# Altium PCB 02_UNROUTED_REFINED_PLACEMENT.PcbDoc (part 5 of 5)
Units mil, origin at the board's own origin, x right, y up, seen from the top; angles counter-clockwise.
Board outline 3149.61 x 1771.65 mil, 4 copper layers (L1 TOP, L2 GND, L3 POWER SIGNAL, L4 BOTTOM GND), stack 45.835 mil thick; 209 components, 132 nets, 761 pads, 5 vias.
Unrouted connection lines stored in the file: 548.
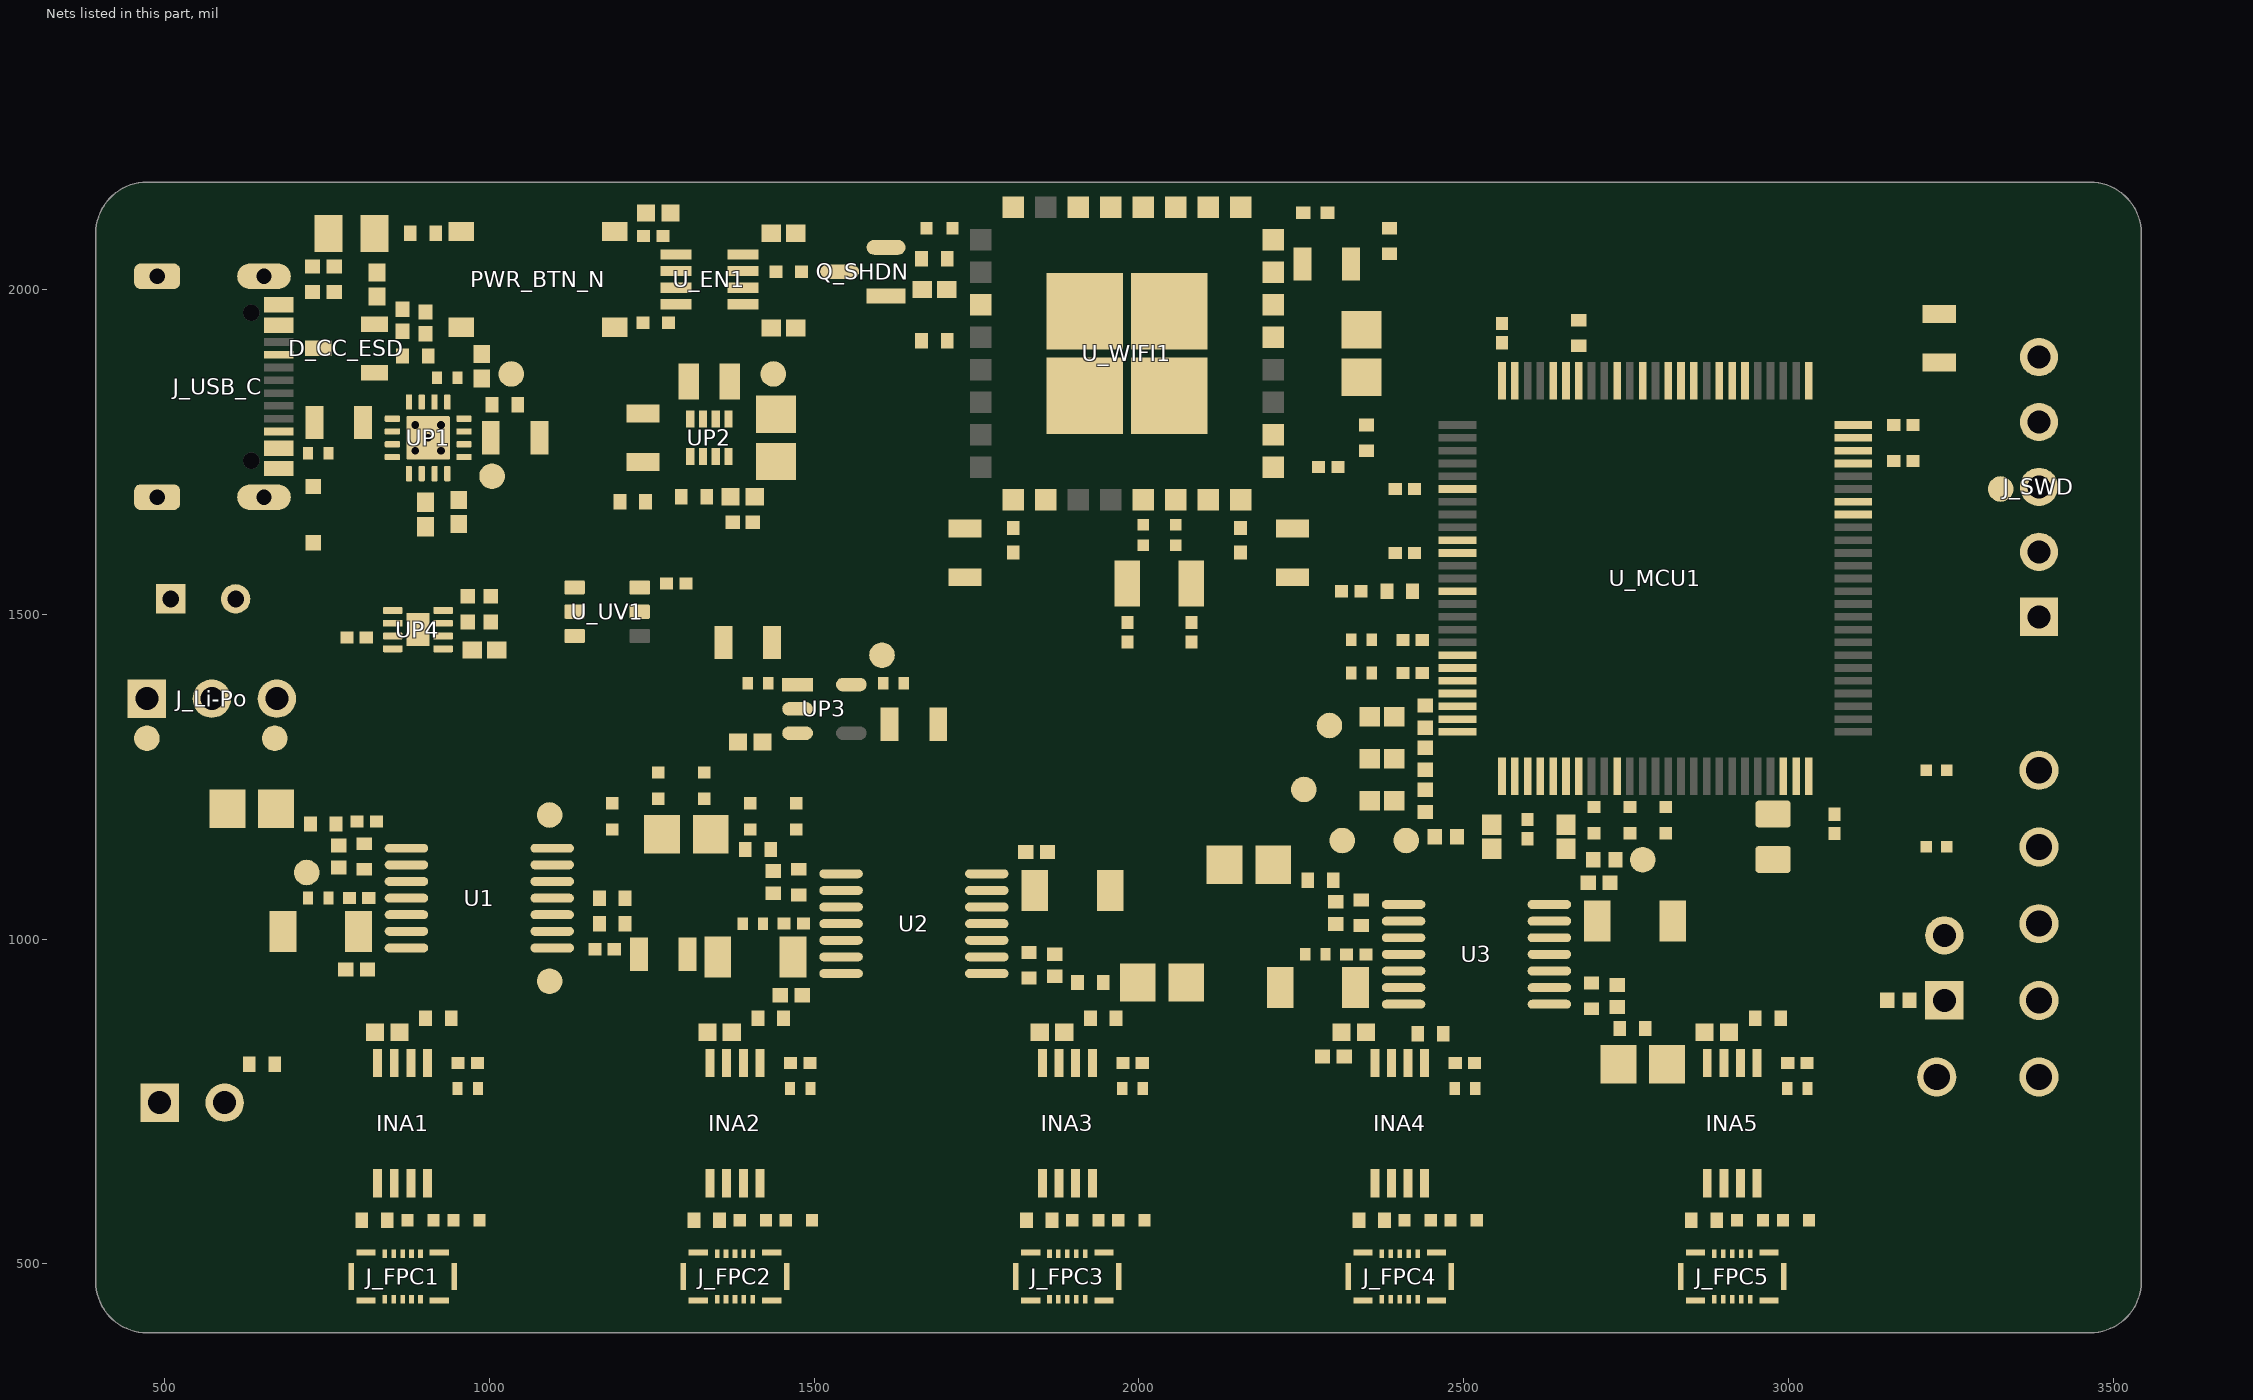
[diagram p2: the nets of this part, all layers, seen from the top]

## Part data (continued)
UP3: library part EMG_R5_UP3, "IC REG LINEAR 3V 300MA SOT23-5", Controlled Revision="R5 2026-09-16; project-local frozen symbol/footprint", RoHS Compliant=Yes
UP4: library part EMG_R5_UP4, "3ÂµA 1-Cell/2-Cell Fuel Gauge with ModelGauge", Package="TDFN-8 Maxim", Availability="In Stock", Check_prices=https://www.snapeda.com/parts/MAX17048G+T10/Analog+Devices/view-part/?ref=eda, Controlled Revision="R5 2026-09-16; project-local frozen symbol/footprint", MF="Analog Devices", MP=MAX17048G+T10, Price=None, Purchase-URL=https://pricing.snapeda.com/search/part/MAX17048G+T10/?ref=eda, SnapEDA_Link=https://www.snapeda.com/parts/MAX17048G+T10/Analog+Devices/view-part/?ref=snap
X_WIFI_32K: library part EMG_R5_X_WIFI_32K, "Epson FC-135 32.768 kHz 9 pF +/-20 ppm, ESR 70 kohm max, 3.2x1.5 mm, 2 terminals", Frequency="32.768 kHz", Load Capacitance="9 pF", Manufacturer="Seiko Epson Corporation", Package="SMD3215 / 3.2 x 1.5 mm / 2 terminal", Temperature Range="-40 to +85 degC", Tolerance="+/-20 ppm at 25 degC, 0.1 uW", Controlled Revision="R5 2026-09-16; project-local frozen symbol/footprint", Datasheet Link=https://download.epsondevice.com/td/pdf/td_xtal_32khz/FC-135_Q13FC13500003_en.pdf, Drive Level="0.1 uW nominal; 0.5 uW maximum", ESR="70 kohm maximum", Height="0.8 +/-0.1 mm", Manufacturer Part Number=Q13FC13500003, Packaging Note="Q13FC13500003xx; xx=00 is 3000/reel"

## Free pads (board coordinates)
  round 39.37 smd paste-19.68 mask+1.97: TP_3V0_ANA(1604.33,1437.01) TP_3V3_DIG(1437.01,1870.08) TP_GND_ANA(718.5,1102.36) TP_GND_DIG(3326.77,1692.91) TP_GND_PWR(472.44,1309.06) TP_VBAT_CELL(669.29,1309.06) TP_VBUS(1033.46,1870.08) TP_VOUT_1(2293.31,1328.74) TP_VOUT_2(2411.42,1151.57) TP_VOUT_3(2312.99,1151.57) TP_VOUT_4(2253.94,1230.32) TP_VOUT_5(2775.59,1122.05) TP_VREF_A(1092.52,935.04) TP_VREF_B_SRC(1092.52,1190.94) TP_VSYS(1003.94,1712.6)

## Via types
v1: diameter 19.68, hole 11.81, L1 TOP to L4 BOTTOM GND, 5 vias

## Nets (pads, with @x,y where several pads share a name; then routed paths per layer and width w, separated by ;. In a path a pad name is that pad's centre, name@x,y a point inside that pad or via, vN(x,y) a via of type N, cw(c..) or ccw(c..) an arc to the next point about the centre after c; other vN are vias at no path point)
3V0_ANA: C1_MCU.1 C2_MCU.2 C3_MCU.1 C4_MCU.2 CCU1.1 CCU2.2 CCU3.2 CCU4.1 CCU5.2 CCU6.1 CCU7.2 CCU8.1 CCU9.2 CCU10.1 Cdiv.2 CU_11.2 CU_12.2 CU_14.2 CU_21.1 CU_22.1 CU_24.1 CUP5_2.2 CUP5_3.2 INA1.5 INA2.5 INA3.5 INA4.5 INA5.5 J_FPC1.P1_1 J_FPC1.P1_2 J_FPC1.P1_3 J_FPC2.P1_1 J_FPC2.P1_2 J_FPC2.P1_3 J_FPC3.P1_1 J_FPC3.P1_2 J_FPC3.P1_3 J_FPC4.P1_1 J_FPC4.P1_2 J_FPC4.P1_3 J_FPC5.P1_1 J_FPC5.P1_2 J_FPC5.P1_3 pad.TP_3V0_ANA RV2.1 U1.4 U2.4 U3.4 U_MCU1.21 U_MCU1.22 UP3.5
3V3_DIG: C_MCU_BULK.1 C_MCU_VDD1.2 C_MCU_VDD2.2 C_MCU_VDD3.2 C_MCU_VDD4.1 C_MCU_VDD5.1 C_VBAT.2 C_VDDUSB.1 C_WIFI_BULK.2 C_WIFI_VDD33.1 C_WIFI_VDD33_HF.1 C_WIFI_VDDIO1.2 C_WIFI_VDDIO1_HF.1 C_WIFI_VDDIO2.2 C_WIFI_VDDIO2_HF.2 CUP4.1 CUP4_FB.2 CUP5_1.1 CUP5_5.1 J_SWD.1 pad.TP_3V3_DIG R_AL.2 R_INT_PULLUP.1 R_KILL_PU.2 R_NRST.2 R_PGOOD.2 R_SCL.2 R_SDA.2 R_WIFI_BOOT_OVR.1 RUP_3.2 U_MCU1.6 U_MCU1.11 U_MCU1.28 U_MCU1.50 U_MCU1.73 U_MCU1.75 U_MCU1.100 U_WIFI1.9 U_WIFI1.16 U_WIFI1.25 UP2.1 UP2.6 UP3.1
ADC_EMG1: C_ADC1.1 R_ADC1.2 U_MCU1.23
ADC_EMG2: C_ADC2.1 R_ADC2.2 U_MCU1.24
ADC_EMG3: C_ADC3.1 R_ADC3.2 U_MCU1.25
ADC_EMG4: C_ADC4.1 R_ADC4.2 U_MCU1.26
ADC_EMG5: C_ADC5.1 R_ADC5.2 U_MCU1.29
AFE_EN: R_EN_PD.1 U_MCU1.85 UP3.3
BAT_TEMP: J_Li-Po.2 R_TH_BAT.2 R_TS_BOTTOM.2 R_TS_SER.1 R_TS_TOP.1
FG_ALRT: R_AL.1 U_MCU1.81 UP4.5
GND: C1_EN1.1 C1_MCU.2 C2_EN1.2 C2_MCU.1 C3_EN1.1 C3_MCU.2 C4_MCU.1 C_ADC1.2 C_ADC2.2 C_ADC3.2 C_ADC4.2 C_ADC5.2 C_BAT.2 C_IN_.2 C_MCU_BULK.2 C_MCU_VDD1.1 C_MCU_VDD2.1 C_MCU_VDD3.1 C_MCU_VDD4.2 C_MCU_VDD5.2 C_NRST.2 C_OUT_.2 C_UV_BYPASS.2 C_VBAT.1 C_VBUS.1 C_VDDUSB.2 C_WIFI_BULK.1 C_WIFI_EN.2 C_WIFI_VDD33.2 C_WIFI_VDD33_HF.2 C_WIFI_VDDIO1.1 C_WIFI_VDDIO1_HF.2 C_WIFI_VDDIO2.1 C_WIFI_VDDIO2_HF.1 C_WIFI_X32_IN.1 C_WIFI_X32_OUT.1 CCU1.2 CCU2.1 CCU3.1 CCU4.2 CCU5.1 CCU6.2 CCU7.1 CCU8.2 CCU9.1 CCU10.2 Cdiv.1 Cdiv_1.1 Cdiv_10uF.1 CU6_1.1 CU_11.1 CU_12.1 CU_14.1 CU_21.2 CU_22.2 CU_24.2 CUP4.2 CUP4_1.2 CUP5_1.2 CUP5_2.1 CUP5_3.1 CUP5_5.2 D_CC_ESD.3 D_VBUS.2 INA1.1 INA1.4 INA2.1 INA2.4 INA3.1 INA3.4 INA4.1 INA4.4 INA5.1 INA5.4 J_FPC1.1 J_FPC1.3 J_FPC1.5 J_FPC1.7 J_FPC1.9 J_FPC1.10 J_FPC1.P2_1 J_FPC1.P2_2 J_FPC1.P2_3 J_FPC2.1 J_FPC2.3 J_FPC2.5 J_FPC2.7 J_FPC2.9 J_FPC2.10 J_FPC2.P2_1 J_FPC2.P2_2 J_FPC2.P2_3 J_FPC3.1 J_FPC3.3 J_FPC3.5 J_FPC3.7 J_FPC3.9 J_FPC3.10 J_FPC3.P2_1 J_FPC3.P2_2 J_FPC3.P2_3 J_FPC4.1 J_FPC4.3 J_FPC4.5 J_FPC4.7 J_FPC4.9 J_FPC4.10 J_FPC4.P2_1 J_FPC4.P2_2 J_FPC4.P2_3 J_FPC5.1 J_FPC5.3 J_FPC5.5 J_FPC5.7 J_FPC5.9 J_FPC5.10 J_FPC5.P2_1 J_FPC5.P2_2 J_FPC5.P2_3 J_Li-Po.1 J_SWD.3 J_USB_C.A1_B12 J_USB_C.B1_A12 J_USB_C.SH1 J_USB_C.SH2 J_USB_C.SH3 J_USB_C.SH4 MCU_VCAP.1 pad.TP_GND_ANA pad.TP_GND_DIG pad.TP_GND_PWR PWR_BTN_N.C PWR_BTN_N.D Q_SHDN.2 R_EN_PD.2 R_LIM.1 R_MCU_BOOT0_PD.1 R_SHDN_PD.1 R_TH_BAT.1 R_TMR.1 R_TS_BOTTOM.1 R_WIFI_BOOT_PD.1 R_WIFI_CS_PD.2 R_WIFI_EN_PD.2 RISET.2 RJ1.1 RJ2.1 RUP_4.1 RV1.2 TP_GND.TP U1.11 U2.11 U3.11 U_EN1.4 U_MCU1.10 U_MCU1.19 U_MCU1.20 U_MCU1.27 U_MCU1.49 U_MCU1.74 U_MCU1.99 U_UV1.2 U_WIFI1.10 U_WIFI1.15 U_WIFI1.18 U_WIFI1.26 U_WIFI1.30 U_WIFI1.32 U_WIFI1.33 U_WIFI1.34 U_WIFI1.35 U_WIFI1.36 UP1.4 UP1.5 UP1.8 UP1.15 UP1.17@905.51,1771.65 UP2.7 UP3.2 UP4.1 UP4.4 UP4.6 UP4.9
  other v1: 885.83,1751.97 925.2,1751.97 905.51,1771.65 885.83,1791.34 925.2,1791.34
I2C_SCL: R_SCL.1 U_MCU1.95 UP4.7
I2C_SDA: R_SDA.1 U_MCU1.96 UP4.8
INA_OUT_1: CL_1.2 INA1.8 RH_1.1 Rservo_1.2
INA_OUT_2: CL_2.2 INA2.8 RH_2.1 Rservo_2.2
INA_OUT_3: CL_3.2 INA3.8 RH_3.1 Rservo_3.2
INA_OUT_4: CL_4.2 INA4.8 RH_4.1 Rservo_4.2
INA_OUT_5: CL_5.2 INA5.8 RH_5.1 Rservo_5.2
KILL_CTRL: Q_SHDN.3 R_KILL_PU.1 U_EN1.8
MCU_BOOT0: R_MCU_BOOT0_PD.2 TP_MCU_BOOT0.TP U_MCU1.94
MCU_NRST: C_NRST.1 J_SWD.5 R_NRST.1 U_MCU1.14
MCU_PWR_INT_N: R_INT_PULLUP.2 U_EN1.5 U_MCU1.83
MCU_SHUTDOWN: R_SHDN_G.2 U_MCU1.86
MCU_SPI_MISO: R_SPI_MISO.2 U_MCU1.31
MCU_SPI_MOSI: R_SPI_MOSI.2 U_MCU1.32
MCU_SPI_SCK: R_SPI_SCK.2 U_MCU1.30
MCU_SWCLK: J_SWD.4 U_MCU1.76
MCU_SWDIO: J_SWD.2 U_MCU1.72
MCU_VCAP: MCU_VCAP.2 U_MCU1.48
MCU_WIFI_CS: R_SPI_CS.2 U_MCU1.35
MCU_WIFI_UART_RX: R_WIFI_UART_RX_LINK.2 U_MCU1.69
MCU_WIFI_UART_TX: R_WIFI_UART_TX_LINK.2 U_MCU1.68
NetC1_EN1_2: C1_EN1.2 R_EN1_1.2 U_EN1.1
NetC2_EN1_1: C2_EN1.1 U_EN1.3
NetC3_EN1_2: C3_EN1.2 U_EN1.7
NetC_WIFI_X32_IN_2: C_WIFI_X32_IN.2 R_WIFI_X32_IN.1 X_WIFI_32K.1
NetC_WIFI_X32_OUT_2: C_WIFI_X32_OUT.2 R_WIFI_X32_OUT.1 X_WIFI_32K.2
NetCH_1_2: CH_1.2 RG_1.1 RGN_1.2 U1.2
NetCH_2_2: CH_2.2 RG_2.1 RGN_2.2 U2.2
NetCH_3_2: CH_3.2 RG_3.1 RGN_3.2 U2.9
NetCH_4_2: CH_4.2 RG_4.1 RGN_4.2 U3.2
NetCH_5_2: CH_5.2 RG_5.1 RGN_5.2 U3.9
NetCL_1_1: CL_1.1 RGN_1.1
NetCL_2_1: CL_2.1 RGN_2.1
NetCL_3_1: CL_3.1 RGN_3.1
NetCL_4_1: CL_4.1 RGN_4.1
NetCL_5_1: CL_5.1 RGN_5.1
NetCservo_1_1: Cservo_1.1 Rservo_1.1 U1.6
NetCservo_2_1: Cservo_2.1 Rservo_2.1 U2.6
NetCservo_3_1: Cservo_3.1 Rservo_3.1 U2.13
NetCservo_4_1: Cservo_4.1 Rservo_4.1 U3.6
NetCservo_5_1: Cservo_5.1 Rservo_5.1 U3.13
NetCUP4_FB_1: CUP4_FB.1 RUP_3.1 RUP_4.2 UP2.8
NetD_CC_ESD_1: D_CC_ESD.1 J_USB_C.A5 RJ1.2
NetD_CC_ESD_2: D_CC_ESD.2 J_USB_C.B5 RJ2.2
NetINA1_2: INA1.2 RDD2.2
NetINA1_3: INA1.3 RDD1.2 RDD3.2
NetINA1_7: INA1.7 RH_1.2 RL_1.1
NetINA2_2: INA2.2 RDD5.2
NetINA2_3: INA2.3 RDD4.2 RDD6.2
NetINA2_7: INA2.7 RH_2.2 RL_2.1
NetINA3_2: INA3.2 RDD8.2
NetINA3_3: INA3.3 RDD7.2 RDD9.2
NetINA3_7: INA3.7 RH_3.2 RL_3.1
NetINA4_2: INA4.2 RDD11.2
NetINA4_3: INA4.3 RDD10.2 RDD12.2
NetINA4_7: INA4.7 RH_4.2 RL_4.1
NetINA5_2: INA5.2 RDD14.2
NetINA5_3: INA5.3 RDD13.2 RDD15.2
NetINA5_7: INA5.7 RH_5.2 RL_5.1
NetJ_FPC1_8: J_FPC1.8 R_VREF1.2
NetJ_FPC2_8: J_FPC2.8 R_VREF2.2
NetJ_FPC3_8: J_FPC3.8 R_VREF3.2
NetJ_FPC4_8: J_FPC4.8 R_VREF4.2
NetJ_FPC5_8: J_FPC5.8 R_VREF5.2
NetJ_REF_1: J_REF.1 J_REF.2 R_ref.1
NetJP_WIFI_BOOT_1: JP_WIFI_BOOT.1 R_WIFI_BOOT_OVR.2
NetL1_1: L1.1 UP2.3
NetL1_2: L1.2 UP2.2
NetLED_CHG_A: LED_CHG.A R_CHG_LED.2
NetLED_CHG_C: LED_CHG.C UP1.9
NetPWR_BTN_N_A: PWR_BTN_N.A PWR_BTN_N.B U_EN1.2
NetQ_SHDN_1: Q_SHDN.1 R_SHDN_G.1 R_SHDN_PD.2
NetR_EN1_BIAS_2: R_EN1_BIAS.2 UP1.6
NetR_LIM_2: R_LIM.2 UP1.12
NetR_TMR_2: R_TMR.2 UP1.14
NetRISET_1: RISET.1 UP1.16
SYS_EN: R_EN.2 U_EN1.6 U_UV1.1 UP2.5
TS: R_TS_SER.2 UP1.1
USB_PGOOD_N: R_PGOOD.1 U_MCU1.82 UP1.7
Va_1: J_FPC1.2 RDD1.1
Va_2: J_FPC2.2 RDD4.1
Va_3: J_FPC3.2 RDD7.1
Va_4: J_FPC4.2 RDD10.1
Va_5: J_FPC5.2 RDD13.1
Vb_1: J_FPC1.4 RDD2.1
Vb_2: J_FPC2.4 RDD5.1
Vb_3: J_FPC3.4 RDD8.1
Vb_4: J_FPC4.4 RDD11.1
Vb_5: J_FPC5.4 RDD14.1
VBAT_CELL: C_BAT.1 CU6_1.2 J_Li-Po.3 pad.TP_VBAT_CELL UP1.2 UP1.3 UP4.2 UP4.3
VBUS: C_IN_.1 C_VBUS.2 D_VBUS.1 J_USB_C.A4_B9 J_USB_C.B4_A9 pad.TP_VBUS R_TS_TOP.2 UP1.13
Vc_1: J_FPC1.6 RDD3.1
Vc_2: J_FPC2.6 RDD6.1
Vc_3: J_FPC3.6 RDD9.1
Vc_4: J_FPC4.6 RDD12.1
Vc_5: J_FPC5.6 RDD15.1
VDiv: Cdiv_1.2 Cdiv_10uF.2 RV1.1 RV2.2 U1.10 U1.12
VOUT_1: CH_1.1 pad.TP_VOUT_1 R_ADC1.1 RG_1.2 U1.1
VOUT_2: CH_2.1 pad.TP_VOUT_2 R_ADC2.1 RG_2.2 U2.1
VOUT_3: CH_3.1 pad.TP_VOUT_3 R_ADC3.1 RG_3.2 U2.8
VOUT_4: CH_4.1 pad.TP_VOUT_4 R_ADC4.1 RG_4.2 U3.1
VOUT_5: CH_5.1 pad.TP_VOUT_5 R_ADC5.1 RG_5.2 U3.8
VREF_A: pad.TP_VREF_A RL_1.2 RL_2.2 RL_3.2 RL_4.2 RL_5.2 U1.3 U1.5 U1.8 U1.9 U2.3 U2.5 U2.10 U2.12 U3.3 U3.5 U3.10 U3.12
VREF_B_SRC: pad.TP_VREF_B_SRC R_ref.2 R_VREF1.1 R_VREF2.1 R_VREF3.1 R_VREF4.1 R_VREF5.1 U1.13 U1.14
Vservo_1: Cservo_1.2 INA1.6 U1.7
Vservo_2: Cservo_2.2 INA2.6 U2.7
Vservo_3: Cservo_3.2 INA3.6 U2.14
Vservo_4: Cservo_4.2 INA4.6 U3.7
Vservo_5: Cservo_5.2 INA5.6 U3.14
VSYS: C_OUT_.1 C_UV_BYPASS.1 CUP4_1.1 pad.TP_VSYS R_CHG_LED.1 R_EN1_1.1 R_EN1_BIAS.1 R_EN.1 U_UV1.3 U_UV1.5 U_UV1.6 UP1.10 UP1.11 UP2.4
WIFI_BOOT: JP_WIFI_BOOT.2 R_WIFI_BOOT_PD.2 TP_WIFI_BOOT.TP U_MCU1.91 U_WIFI1.3
WIFI_CHIP_EN: C_WIFI_EN.1 R_WIFI_EN_PD.1 TP_WIFI_CHIP_EN.TP U_MCU1.87 U_WIFI1.17
WIFI_SPI_CLK: R_SPI_SCK.1 U_WIFI1.28
WIFI_SPI_CS: R_SPI_CS.1 R_WIFI_CS_PD.1 U_WIFI1.24
WIFI_SPI_MISO: R_SPI_MISO.1 U_WIFI1.29
WIFI_SPI_MOSI: R_SPI_MOSI.1 U_WIFI1.27
WIFI_SPI_RDY: U_MCU1.89 U_WIFI1.21
WIFI_UART_RX: R_WIFI_UART_TX_LINK.1 TP_WIFI_UART_RX.TP U_WIFI1.23
WIFI_UART_TX: R_WIFI_UART_RX_LINK.1 TP_WIFI_UART_TX.TP U_WIFI1.22
WIFI_X32_RAW_IN: R_WIFI_X32_IN.2 U_WIFI1.14
WIFI_X32_RAW_OUT: R_WIFI_X32_OUT.2 U_WIFI1.13
pads on no net: J_USB_C. J_USB_C.A6 J_USB_C.A7 J_USB_C.A8 J_USB_C.B6 J_USB_C.B7 J_USB_C.B8 U_MCU1.1 U_MCU1.2 U_MCU1.3 U_MCU1.4 U_MCU1.5 U_MCU1.7 U_MCU1.8 U_MCU1.9 U_MCU1.12 U_MCU1.13 U_MCU1.15 U_MCU1.16 U_MCU1.17 U_MCU1.18 U_MCU1.33 U_MCU1.34 U_MCU1.36 U_MCU1.37 U_MCU1.38 U_MCU1.39 U_MCU1.40 U_MCU1.41 U_MCU1.42 U_MCU1.43 U_MCU1.44 U_MCU1.45 U_MCU1.46 U_MCU1.47 U_MCU1.51 U_MCU1.52 U_MCU1.53 U_MCU1.54 U_MCU1.55 U_MCU1.56 U_MCU1.57 U_MCU1.58 U_MCU1.59 U_MCU1.60 U_MCU1.61 U_MCU1.62 U_MCU1.63 U_MCU1.64 U_MCU1.65 U_MCU1.66 U_MCU1.67 U_MCU1.70 U_MCU1.71 U_MCU1.77 U_MCU1.78 U_MCU1.79 U_MCU1.80 U_MCU1.84 U_MCU1.88 U_MCU1.90 U_MCU1.92 U_MCU1.93 U_MCU1.97 U_MCU1.98 U_UV1.4 U_WIFI1.1 U_WIFI1.2 U_WIFI1.4 U_WIFI1.5 U_WIFI1.6 U_WIFI1.7 U_WIFI1.8 U_WIFI1.11 U_WIFI1.12 U_WIFI1.19 U_WIFI1.20 U_WIFI1.31 UP1.17@905.51,1771.65 UP3.4

## Keep-outs
Keep-Out Layer:
  region: 1739.76,2143.31 2223.23,2143.31 2223.23,2340.16 1739.76,2340.16

## Text inside footprints (layer, text, board x,y; h text height)
J_USB_C: Top 3D Body "PCB EDGE" at 389.76,1637.8 h16 r270